# EAGLE board X15_PowerPlate (EAGLE 9.7.0)
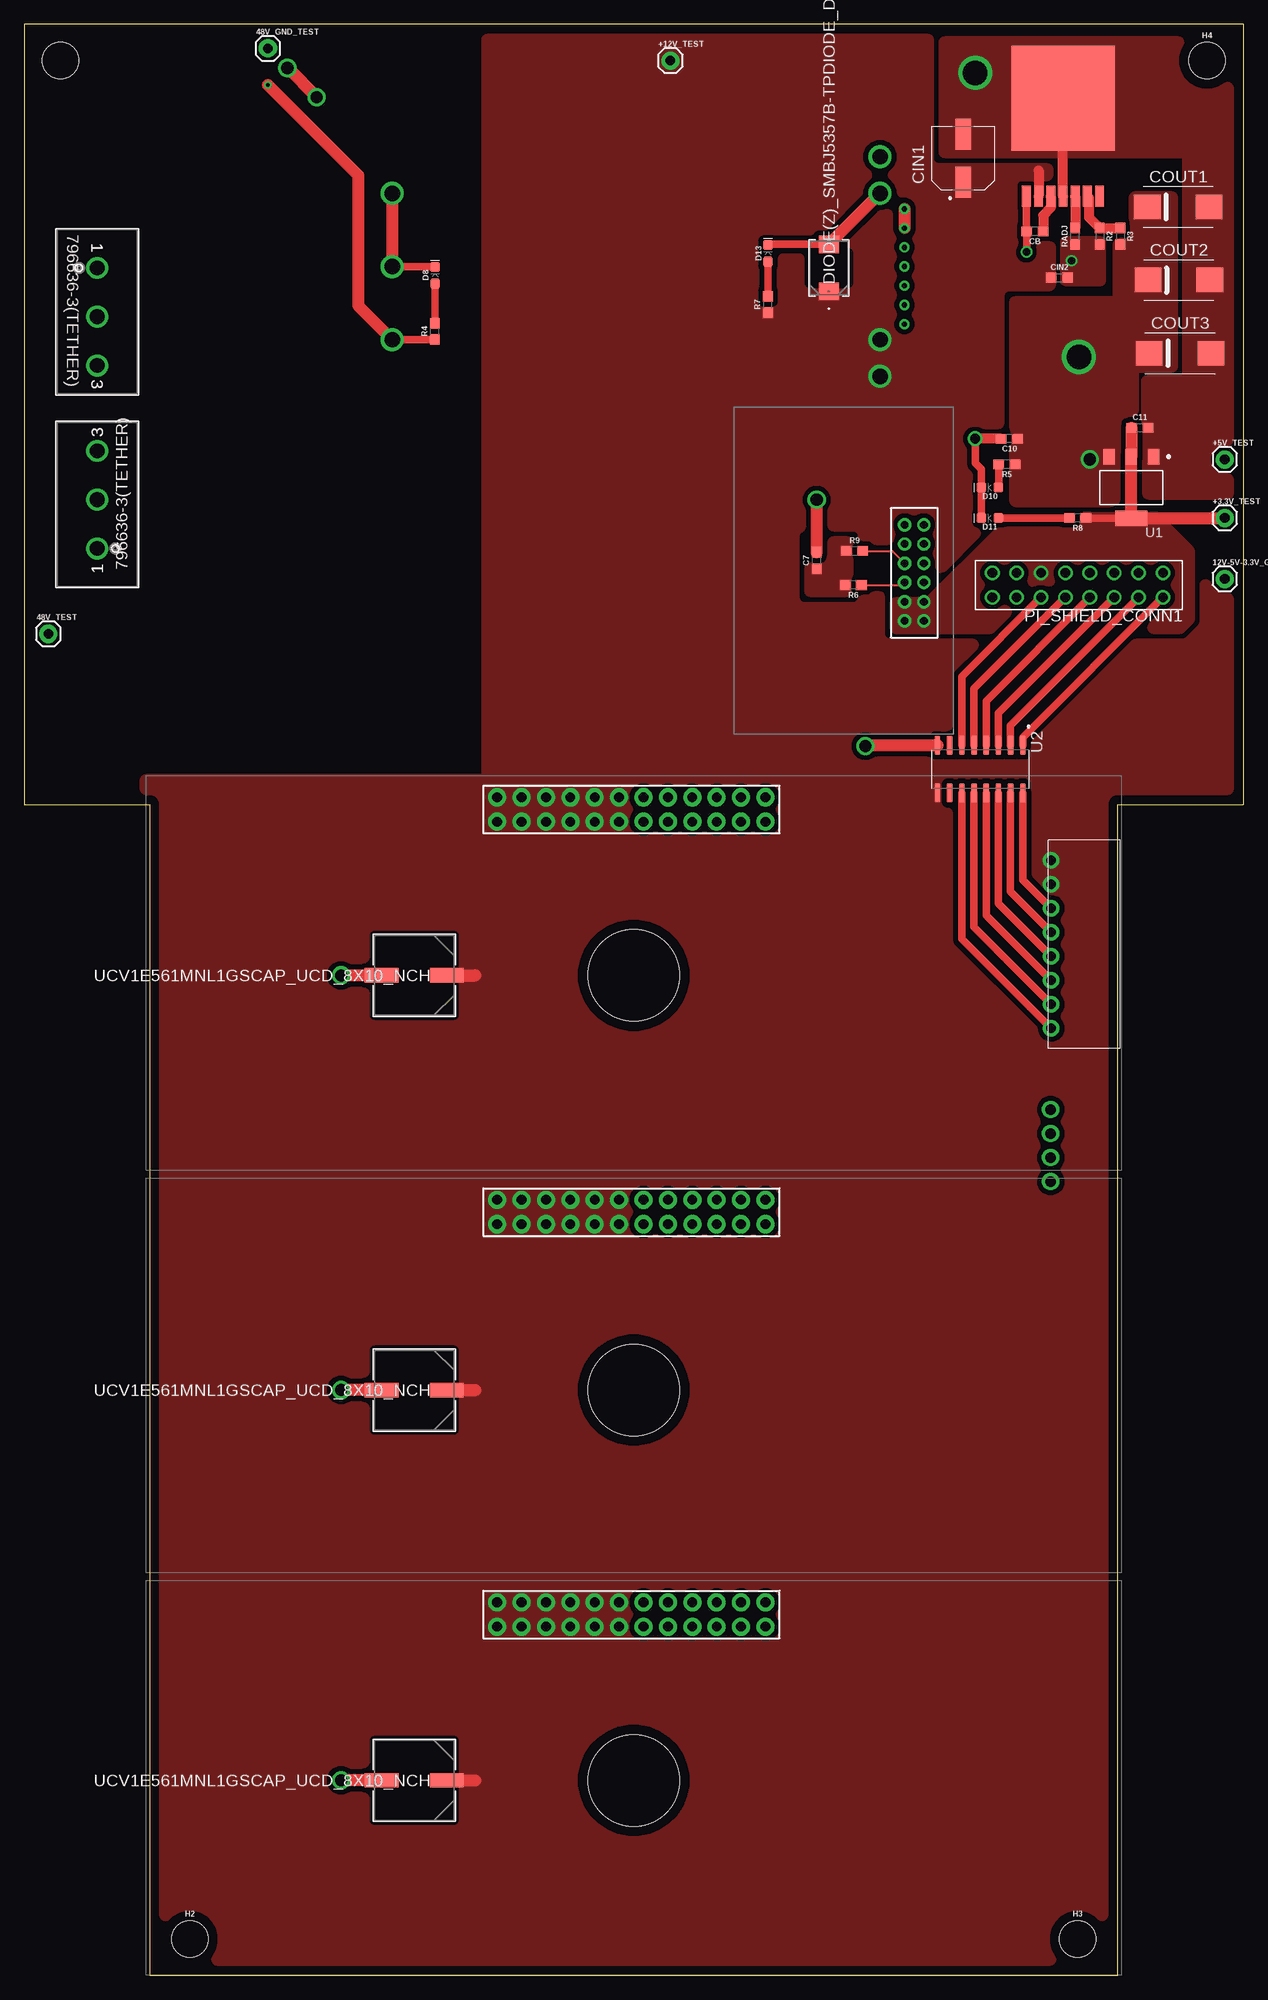
[diagram p0: board, top side]
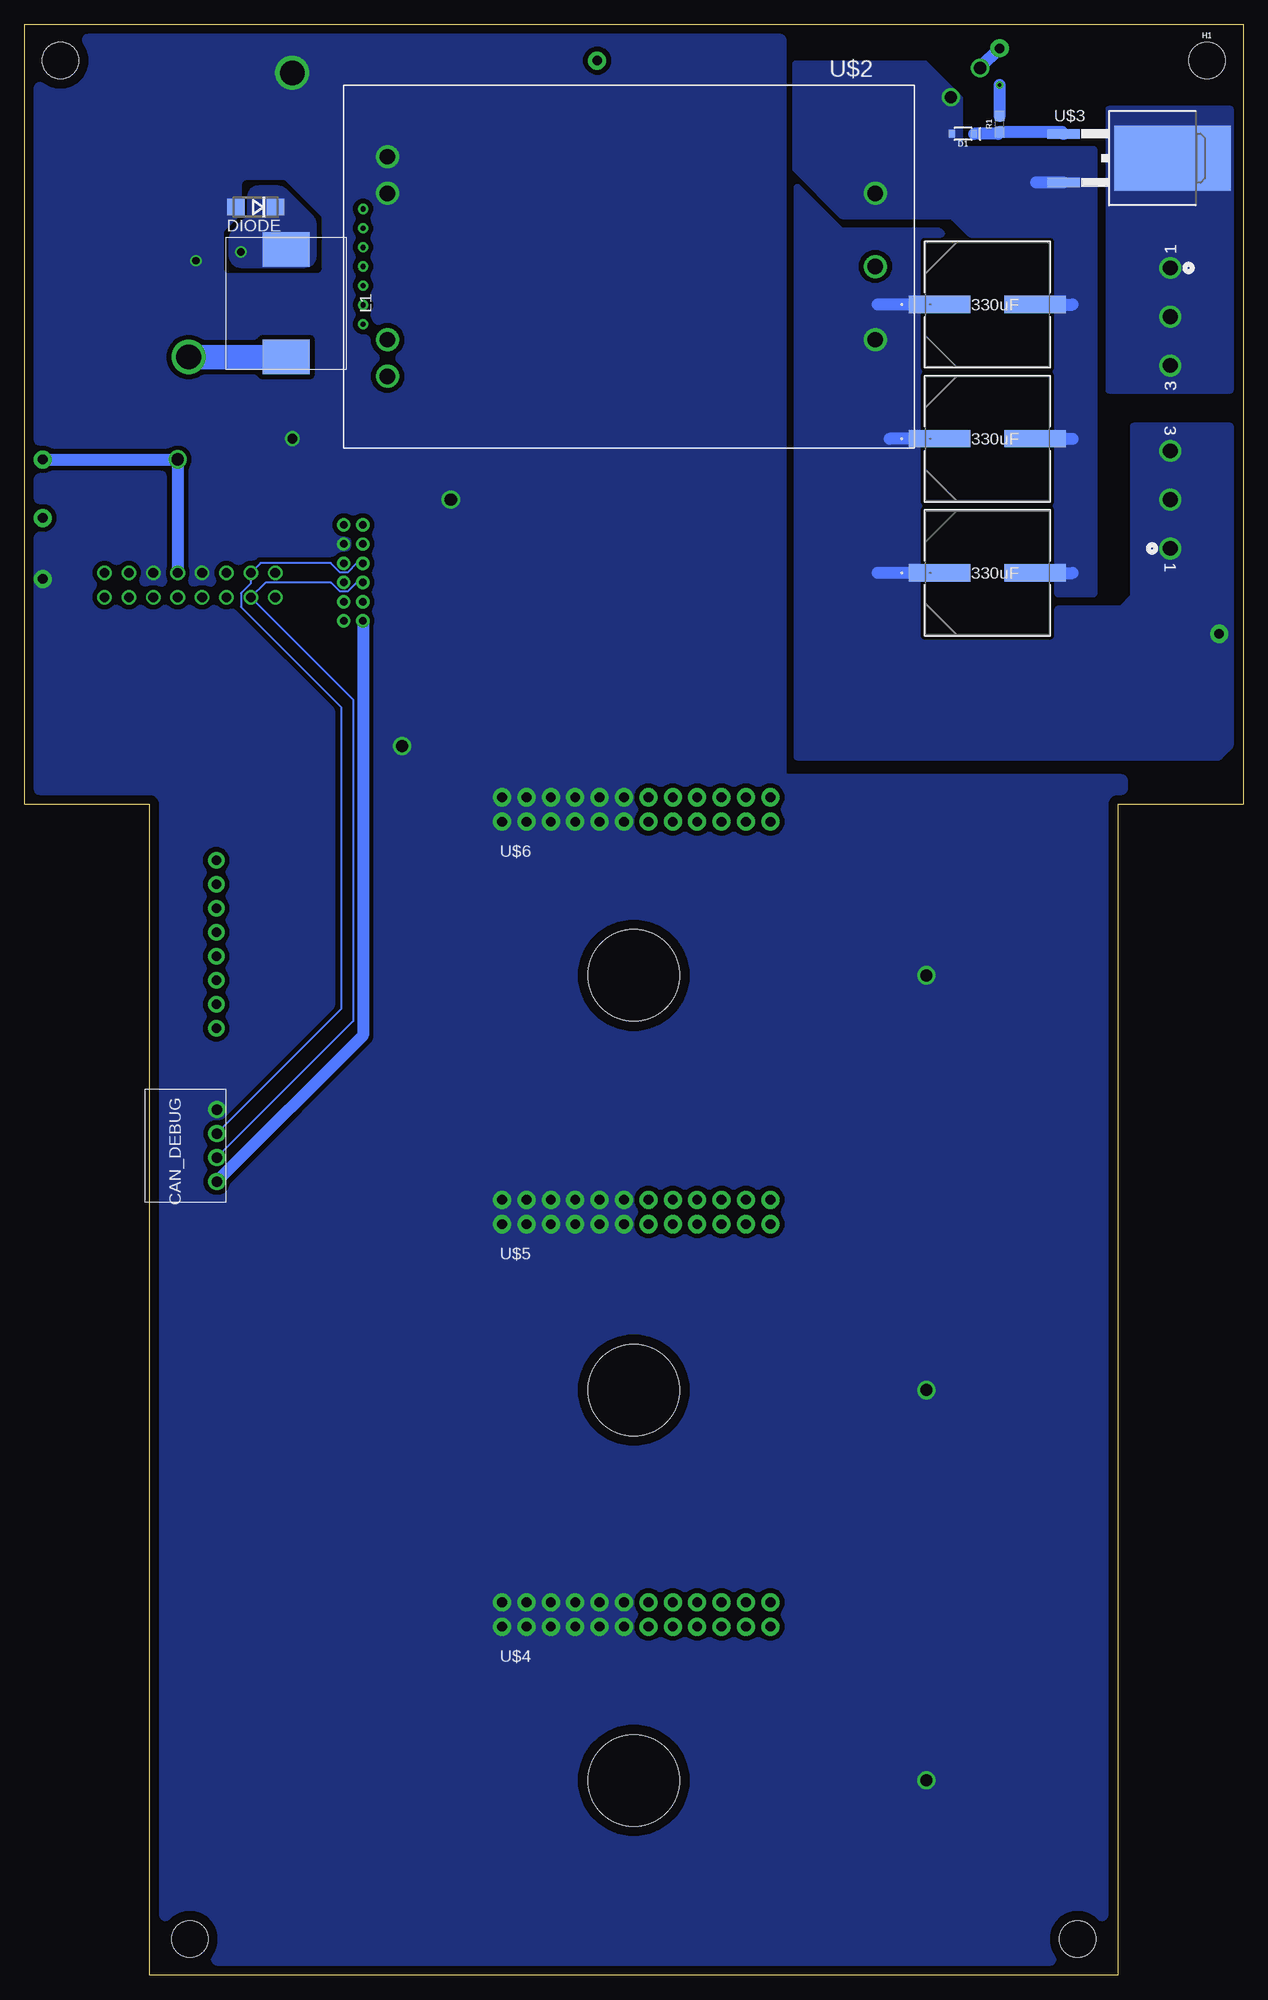
[diagram p1: board, bottom side, seen from below]

Size 127 x 203.2 mm. Coordinates in mm from the lower left corner, seen from the top.
Outline: 13.08,0 113.92,0 113.92,121.92 127,121.92 127,203.2 0,203.2 0,121.92 13.08,121.92 13.08,0
Copper layers (1*16): Top / Bottom
Stack-up Default Layer Stack: Top User Defined 0.035mm / Dielectric-1 User Defined 1.5mm / Bottom User Defined 0.035mm
Design rules "477": minimum track width 6mil, minimum drill 0.35mm, track to track 6mil, track to pad 6mil, pad to pad 6mil, via to via 6mil, smd to smd 6mil, copper to edge 40mil, drill to drill 6mil, minimum pad ring 10mil, minimum via ring 8mil, stop-mask expansion 4mil, vias tented up to drill 0mil, thermal gap 10mil
Holes 9.53 mm at 63.5,60.96 63.5,104.14 63.5,20.32

## Footprints (pad centres in the part's own frame; a part is rotated, then mirrored left to right if it is on the bottom)
1X01 = drill 1.016 pad 1.88: 1 0,0
CAP_099112E3_VIS-M = smd 6.401 x 1.803: 1 -4.966,0; 2 4.966,0
CAP_UCD_8X10_NCH = smd 3.505 x 1.499: 1 -3.404,0; 2 3.404,0
0603 = smd 1.1 x 1: 1 -0.85,0; 2 0.85,0
PXC-PTSM-04-RA-1778641 = drill 1.1 pad 1.8: 1 0,0; 2 2.5,0; 3 5,0; 4 7.5,0
CAP_EEEFKE181XSP = smd 3.2 x 1.6: 1 -2.5,0; 2 2.5,0
2917(7343-31-METRIC) = smd 2.77 x 2.55: + -3.22,0; - 3.22,0
DIODE_DO-214AA_4P38X3P62_MCC-M = smd 1.803 x 2.108: 1 -2.451,0; 2 2.451,0
SOD-323 = smd 0.63 x 0.83: A 1.15,0; C -1.15,0
LED-0603 = smd 1 x 1: A -0.877,0; C 0.877,0
DO214AC = smd 1.8 x 1.7: A 2.05,0; C -2.05,0
BACKPLANE_CONNECTORS_BKP = drill 0.79 pad 1.39: 1 -1,-5; 2 1,-5; 3 -1,-3; 4 1,-3; 5 -1,-1; 6 1,-1; 7 -1,1; 8 1,1; 9 -1,3; 10 1,3; 11 -1,5; 12 1,5
6-32-HOLE = hole 3.81: 0,0
HCMA1305 = smd 3.6 x 4.9: 1 -5.6,0; 2 5.6,0
IPL7X2 = drill 1.016 pad 1.524: 1 2.032,3.81; 2 2.032,1.27; 3 4.572,3.81; 4 4.572,1.27; 5 7.112,3.81; 6 7.112,1.27; 7 9.652,3.81; 8 9.652,1.27; 9 12.192,3.81; 10 12.192,1.27; 11 14.732,3.81; 12 14.732,1.27; 13 17.272,3.81; 14 17.272,1.27; 15 19.812,3.81; 16 19.812,1.27
PXC-8-RA-1778683 = drill 1 pad 1.7: 1 2.1,7.2; 2 4.6,7.2; 3 7.1,7.2; 4 9.6,7.2; 5 12.1,7.2; 6 14.6,7.2; 7 17.1,7.2; 8 19.6,7.2
CON3_P5MM_VER_TERM-BLK_TYC = drill 1.524 pad 2.032: 1 0,0; 2 5.08,0; 3 10.16,0
LINEAR,AZ1117CR-3.3TRG1 = smd 1.2 x 1.6: 1 -2.3,-3.2; 2 0,-3.2; 3 2.3,-3.2 | smd 3.3 x 1.6: 4 0,3.2
16-SOIC = smd 1.97 x 0.6: 1 -2.475,4.445; 2 -2.475,3.175; 3 -2.475,1.905; 4 -2.475,0.635; 5 -2.475,-0.635; 6 -2.475,-1.905; 7 -2.475,-3.175; 8 -2.475,-4.445; 9 2.475,-4.445; 10 2.475,-3.175; 11 2.475,-1.905; 12 2.475,-0.635; 13 2.475,0.635; 14 2.475,1.905; 15 2.475,3.175; 16 2.475,4.445
BMR480_CONNECTOR = drill 1.6 pad 2: PIN1 4.06,26.52; PIN2 4.06,18.9; PIN3 4.06,11.28; PIN4 54.86,7.47; PIN5 54.86,11.28; PIN7 54.86,26.52; PIN8 54.86,30.33 | drill 0.55: PIN9 57.4,12.9; PIN10 57.4,14.9; PIN11 57.4,16.9; PIN12 57.4,18.9; PIN13 57.4,20.9; PIN14 57.4,22.9; PIN15 57.4,24.9
D2PAK = smd 3.4 x 1: 1 -6.552,2.54; 2 -6.552,-2.54 | smd 12.14 x 6.8: 3 4.818,0
BACKPLANE_ESC_ADAPTER_BKP_PWR = drill 1.016 pad 1.88: 12V@1 65.024,36.322; 12V@2 65.024,38.862; 12V@3 62.484,36.322; 12V@4 62.484,38.862; 12V@5 59.944,36.322; 12V@6 59.944,38.862; 12V@7 57.404,36.322; 12V@8 57.404,38.862; 12V@9 54.864,36.322; 12V@10 54.864,38.862; 12V@11 52.324,36.322; 12V@12 52.324,38.862; GND@1 49.784,38.862; GND@2 49.784,36.322; GND@3 47.244,38.862; GND@4 47.244,36.322; GND@5 44.704,38.862; GND@6 44.704,36.322; GND@7 42.164,38.862; GND@8 42.164,36.322; GND@9 39.624,38.862; GND@10 39.624,36.322; GND@11 37.084,38.862; GND@12 37.084,36.322
BUCK,LM2679SX-ADJ = smd 2.16 x 0.91: PIN1 0,-7.62; PIN2 0,-6.35; PIN3 0,-5.08; PIN4 0,-3.81; PIN5 0,-2.54; PIN6 0,-1.27; PIN7 0,0 | smd 10.918 x 10.8: PIN8 -10.195,-3.81

## Placement (x,y rotation side)
12V-5V-3.3V_GND  [1X01]  125.04,145.41 0 top
48V_GND_TEST  [1X01]  25.4,200.66 0 top
48V_TEST  [1X01]  2.54,139.7 0 top
+3.3V_TEST  [1X01]  125.04,151.76 0 top
+5V_TEST  [1X01]  125.04,157.86 0 top
+12V_TEST  [1X01]  67.31,199.39 0 top
C1  330uF  [CAP_099112E3_VIS-M]  26.67,146.05 0 bottom
C2  330uF  [CAP_099112E3_VIS-M]  26.67,173.99 0 bottom
C3  330uF  [CAP_099112E3_VIS-M]  26.67,160.02 0 bottom
C4  UCV1E561MNL1GSCAP_UCD_8X10_NCH  [CAP_UCD_8X10_NCH]  40.64,104.14 180 top
C5  UCV1E561MNL1GSCAP_UCD_8X10_NCH  [CAP_UCD_8X10_NCH]  40.64,60.96 180 top
C6  UCV1E561MNL1GSCAP_UCD_8X10_NCH  [CAP_UCD_8X10_NCH]  40.64,20.32 180 top
C7  0.1uF  [0603]  82.55,147.32 90 top
C10  10uF  [0603]  102.62,160.02 180 top
C11  22uF  [0603]  116.2,161.16 0 top
CAN_DEBUG  PXC-PTSM-04-RA-1778641  [PXC-PTSM-04-RA-1778641]  106.92,90.17 270 bottom
CB  .01uF  [0603]  105.28,181.61 180 top
CIN1  180uF  [CAP_EEEFKE181XSP]  97.79,189.23 90 top
CIN2  .47uF  [0603]  107.82,176.78 0 top
COUT1  150uF  [2917(7343-31-METRIC)]  120.2,184.15 0 top
COUT2  150uF  [2917(7343-31-METRIC)]  120.27,176.53 0 top
COUT3  150uF  [2917(7343-31-METRIC)]  120.4,168.91 0 top
CR1  DIODE(Z)_SMBJ5357B-TPDIODE_DO-214AA_4P38X3P62_MCC-M  [DIODE_DO-214AA_4P38X3P62_MCC-M]  83.82,177.8 90 top
D1  DIODE-ZENERPZU15B3A,115  [SOD-323]  29.21,191.77 180 bottom
D8  RED  [LED-0603]  42.8,177.04 90 top
D10  BLUE  [LED-0603]  100.58,154.94 180 top
D11  WHITE  [LED-0603]  100.58,151.76 180 top
D13  GREEN  [LED-0603]  77.47,179.32 90 top
DIODE  40V  [DO214AC]  102.87,184.15 180 bottom
ESC_CONTROLLER  BACKPLANE_CONNECTORSBKP  [BACKPLANE_CONNECTORS_BKP]  92.71,146.05 0 top
H1  6-32-HOLE  [6-32-HOLE]  3.81,199.39 0 bottom
H2  6-32-HOLE  [6-32-HOLE]  17.27,3.81 0 top
H3  6-32-HOLE  [6-32-HOLE]  109.73,3.81 0 top
H4  6-32-HOLE  [6-32-HOLE]  123.19,199.39 0 top
L1  15uH  [HCMA1305]  99.69,174.12 270 bottom
PI_SHIELD_CONN1  8X_CONN  [IPL7X2]  120.65,147.32 180 top
R1  1M  [0603]  25.4,192.79 90 bottom
R2  1k  [0603]  112.01,181.1 270 top
R3  3.32k  [0603]  114.17,181.1 270 top
R4  1.5k  [0603]  42.8,171.2 90 top
R5  100  [0603]  102.36,157.35 180 top
R6  60  [0603]  86.36,144.78 180 top
R7  470  [0603]  77.47,173.99 90 top
R8  20  [0603]  109.73,151.76 180 top
R9  60  [0603]  86.49,148.34 0 top
RADJ  12.4k  [0603]  109.47,181.1 90 top
SOLENOID  PXC-8-RA-1778683  [PXC-8-RA-1778683]  114.17,96.52 90 top
TETHER_48V  796636-3(TETHER)  [CON3_P5MM_VER_TERM-BLK_TYC]  7.62,148.59 90 top
TETHER_GND  796636-3(TETHER)  [CON3_P5MM_VER_TERM-BLK_TYC]  7.62,177.8 270 top
U1  LINEAR,AZ1117CR-3.3TRG1DIODES_AZ1117CH-3.3TRG1_0_0  [LINEAR,AZ1117CR-3.3TRG1]  115.31,154.94 180 top
U2  ULN2003AD  [16-SOIC]  99.57,125.6 270 top
U$2  CONN_BMR480_CONNECTOR(BRICK)  [BMR480_CONNECTOR]  34.29,196.85 180 bottom
U$3  TRANS_IRF1018ESTRLPBF  [D2PAK]  12.19,189.23 0 bottom
U$4  BACKPLANE_ESC_ADAPTER_PWRBKP  [BACKPLANE_ESC_ADAPTER_BKP_PWR]  114.3,0 0 bottom
U$5  BACKPLANE_ESC_ADAPTER_PWRBKP  [BACKPLANE_ESC_ADAPTER_BKP_PWR]  114.3,41.91 0 bottom
U$6  BACKPLANE_ESC_ADAPTER_PWRBKP  [BACKPLANE_ESC_ADAPTER_BKP_PWR]  114.3,83.82 0 bottom
U$7  BUCK,LM2679SX-ADJ  [BUCK,LM2679SX-ADJ]  112.01,185.26 270 top

## Library data of the parts
12V-5V-3.3V_GND 48V_GND_TEST 48V_TEST +3.3V_TEST +5V_TEST +12V_TEST = SparkFun-Connectors
C1-C3 = X15_Brickstribution; COPYRIGHT: Copyright (C) 2022 Ultra Librarian. All rights reserved.; MANUFACTURER_PART_NUMBER: MAL215099112E3; MFR_NAME: Vishay
C4-C6 = 2023-01-03_19-29-37_Library; COPYRIGHT: Copyright (C) 2023 Ultra Librarian. All rights reserved.; DIGI-KEY_PART_NUMBER_1: 493-14353-1-ND; DIGI-KEY_PART_NUMBER_2: 493-14353-2-ND; DIGI-KEY_PART_NUMBER_3: 493-14353-6-ND; MANUFACTURER_PART_NUMBER: UCV1E561MNL1GS; MFR_NAME: Nichicon
C7 = SparkFun-Capacitors; PROD_ID: CAP-08390
C10 C11 CB CIN2 = SparkFun-Capacitors; PROD_ID: CAP-07880
CAN_DEBUG ESC_CONTROLLER PI_SHIELD_CONN1 U$4-U$6 = X15-Backplane Parts
CIN1 = X15-Conversion-Parts-Library; DESCRIPTION: 180µF 25V Aluminum Electrolytic Capacitors Radial, Can - SMD 340mOhm @ 100kHz 2000 Hrs @ 105°C; DIGI-KEY_PART_NUMBER: P18956TR-ND; MF: Panasonic; MP: EEEFKE181XSP; PACKAGE: RADIAL-2 Panasonic
COUT1-COUT3 DIODE L1 U$7 = X15-Conversion-Parts-Library
CR1 = X15_Brickstribution; COPYRIGHT: Copyright (C) 2022 Ultra Librarian. All rights reserved.; MANUFACTURER_PART_NUMBER: SMBJ5357B-TP; MFR_NAME: MCC
D1 = SparkFun-DiscreteSemi; ZENER_VOLTAGE: 15V
D8 = SparkFun-LED; PROD_ID: DIO-00819
D10 = SparkFun-LED; PROD_ID: DIO-08575
D11 = SparkFun-LED; PROD_ID: DIO-09004
D13 = SparkFun-LED; PROD_ID: DIO-00821
H1-H4 U$3 = X15_Brickstribution
R1 = SparkFun-Resistors; PROD_ID: RES-07868
R2 R3 RADJ = SparkFun-Resistors; PROD_ID: RES-08296
R4 = SparkFun-Resistors; PROD_ID: RES-08306
R5 = SparkFun-Resistors; PROD_ID: RES-12438
R6 R9 = SparkFun-Resistors
R7 = SparkFun-Resistors; PROD_ID: RES-07869
R8 = SparkFun-Resistors; PROD_ID: RES-07862
SOLENOID = X15-Backplane Parts; SPICEPREFIX: X
TETHER_48V TETHER_GND = X15_Brickstribution; COPYRIGHT: Copyright (C) 2022 Ultra Librarian. All rights reserved.; DIGI-KEY_PART_NUMBER_1: A98423-ND; MANUFACTURER_PART_NUMBER: 796636-3; MFR_NAME: TE Connectivity
U1 = X15-Conversion-Parts-Library; AVAILABILITY: In Stock; DESCRIPTION: Linear Voltage Regulator IC Positive Fixed 1 Output 1A SOT-223-3; MF: Diodes Inc.; MP: AZ1117CH-3.3TRG1; PACKAGE: SOT-223 Diodes Inc.; PRICE: None; PURCHASE-URL: https://pricing.snapeda.com/search/part/AZ1117CH-3.3TRG1/?ref=eda
U2 = X15-Pi-Shield-Parts; A1_MIN: 0.25; A_MAX: 1.75; A_MIN: 1.75; A_NOM: 1.75; B_MAX: 0.51; B_MIN: 0.33; B_NOM: 0.42; D2_MAX: 0.0; D_MAX: 10.0; D_MIN: 9.8; D_NOM: 9.9; E1_MAX: 4.0; E1_MIN: 3.8; E1_NOM: 3.9; E2_MAX: 0.0; ENOM: 1.27; E_MAX: 6.2; E_MIN: 5.8; E_NOM: 6.0; L_MAX: 1.27; L_MIN: 0.38; L_NOM: 0.825; MANUFACTURER: Diodes Inc.; PIN_COUNT: 16.0; SNAPEDA_PACKAGE_ID: 27538; STANDARD: IPC 7351B
U$2 = X15-Parts_Bricktribution

## Nets
12V_GND: 12V-5V-3.3V_GND.1 C4.2 C5.2 C6.2 C7.2 C10.2 C11.2 CAN_DEBUG.1 CIN1.2 CIN2.2 COUT1.- COUT2.- COUT3.- CR1.2 D10.C D11.C D13.C DIODE.A ESC_CONTROLLER.10 PI_SHIELD_CONN1.6 PI_SHIELD_CONN1.10 R2.2 RADJ.1 U1.1 U2.8 U$2.PIN4 U$2.PIN5 U$4.GND@1 U$4.GND@2 U$4.GND@3 U$4.GND@4 U$4.GND@5 U$4.GND@6 U$4.GND@7 U$4.GND@8 U$4.GND@9 U$4.GND@10 U$4.GND@11 U$4.GND@12 U$5.GND@1 U$5.GND@2 U$5.GND@3 U$5.GND@4 U$5.GND@5 U$5.GND@6 U$5.GND@7 U$5.GND@8 U$5.GND@9 U$5.GND@10 U$5.GND@11 U$5.GND@12 U$6.GND@1 U$6.GND@2 U$6.GND@3 U$6.GND@4 U$6.GND@5 U$6.GND@6 U$6.GND@7 U$6.GND@8 U$6.GND@9 U$6.GND@10 U$6.GND@11 U$6.GND@12 U$7.PIN4 U$7.PIN8
48V_GND: 48V_GND_TEST.1 C1.2 C2.2 C3.2 D1.A D8.C U$2.PIN2 U$2.PIN3 U$3.2
+3.3V: +3.3V_TEST.1 C11.1 CAN_DEBUG.4 ESC_CONTROLLER.1 ESC_CONTROLLER.2 ESC_CONTROLLER.3 ESC_CONTROLLER.4 PI_SHIELD_CONN1.12 R8.1 U1.2 U1.4
+5.2V: +5V_TEST.1 C10.1 COUT1.+ COUT2.+ COUT3.+ L1.2 PI_SHIELD_CONN1.8 R3.2 R5.1 U1.3
+12V: +12V_TEST.1 C4.1 C5.1 C6.1 CIN1.1 CIN2.1 CR1.1 R7.1 SOLENOID.7 SOLENOID.8 U2.9 U$2.PIN7 U$2.PIN8 U$4.12V@1 U$4.12V@2 U$4.12V@3 U$4.12V@4 U$4.12V@5 U$4.12V@6 U$4.12V@7 U$4.12V@8 U$4.12V@9 U$4.12V@10 U$4.12V@11 U$4.12V@12 U$5.12V@1 U$5.12V@2 U$5.12V@3 U$5.12V@4 U$5.12V@5 U$5.12V@6 U$5.12V@7 U$5.12V@8 U$5.12V@9 U$5.12V@10 U$5.12V@11 U$5.12V@12 U$6.12V@1 U$6.12V@2 U$6.12V@3 U$6.12V@4 U$6.12V@5 U$6.12V@6 U$6.12V@7 U$6.12V@8 U$6.12V@9 U$6.12V@10 U$6.12V@11 U$6.12V@12 U$7.PIN2
+48V: 48V_TEST.1 C1.1 C2.1 C3.1 R1.2 R4.1 TETHER_48V.1 TETHER_48V.2 TETHER_48V.3 U$2.PIN1
BOOST: CB.1 U$7.PIN3
CAN_H: CAN_DEBUG.3 ESC_CONTROLLER.5 PI_SHIELD_CONN1.13 R6.1
CAN_L: CAN_DEBUG.2 ESC_CONTROLLER.7 PI_SHIELD_CONN1.14 R9.2
CRADJ: RADJ.2 U$7.PIN5
DGND: U$2.PIN9 U$2.PIN10
ESC_ID: ESC_CONTROLLER.12
FB: R2.1 R3.1 U$7.PIN6
GND_RAW: TETHER_GND.1 TETHER_GND.2 TETHER_GND.3 U$3.3
GPIO1: PI_SHIELD_CONN1.1 U2.1
GPIO2: PI_SHIELD_CONN1.3 U2.2
GPIO3: PI_SHIELD_CONN1.5 U2.3
GPIO4: PI_SHIELD_CONN1.7 U2.4
GPIO5: PI_SHIELD_CONN1.9 U2.5
GPIO6: PI_SHIELD_CONN1.11 U2.6
N$1: C7.1 R6.2 R9.1
N$4: D8.A R4.2
N$9: D10.A R5.2
N$10: D11.A R8.2
N$13: D13.A R7.2
NRST: ESC_CONTROLLER.6
REV_GATE: D1.C R1.1 U$3.1
SA0: U$2.PIN15
SA1: U$2.PIN14
SALERT: U$2.PIN12
SCLK: U$2.PIN13
SDA: U$2.PIN11
SOL1_1: SOLENOID.6 U2.16
SOL2_1: SOLENOID.5 U2.15
SOL3_1: SOLENOID.4 U2.14
SOL4_1: SOLENOID.3 U2.13
SOL5_1: SOLENOID.2 U2.12
SOL6_1: SOLENOID.1 U2.11
SWCLK: ESC_CONTROLLER.11
SWDIO: ESC_CONTROLLER.9
SWITCH: CB.2 DIODE.C L1.1 U$7.PIN1

## Tracks (layer width: path | path; a pad name or v marks a point on that pad's centre or on a via)
12V_GND  (via drill 0.76, 1.02, 1.27, 2.54)
  Top 0.762: D13.C 77.52,180.25 CR1.2 | v99.06,160.02 99.06,157.48 99.71,156.83 D10.C D11.C
  Top 1.016: U$7.PIN4 108.2,190.25 107.95,190.5 | C10.2 v99.06,160.02
  Top 1.27: C4.2 v33.02,104.14 | C5.2 v33.02,60.96 | C6.2 v33.02,20.32 | CR1.2 89.14,185.57 U$2.PIN5 | C7.2 v82.55,153.67 | U2.8 87.69,128.08 v87.63,128.02
  other vias: 99.06,198.12 109.09,178.56
  pour Bottom (isolate 0.508, rank 2, no thermals): 128.91,203.84 48,203.84 47.62,203.46 47.62,125.09 12.06,125.09 12.06,0.64 128.91,0.64
  pour Top (isolate 0.254, no thermals): 107.95,181.1 112.65,181.1 112.65,175.9 107.95,175.9
  pour Top (isolate 0.508, no thermals): 95.25,201.93 127,201.93 127,153.67 116.33,153.67 116.33,166.62 120.65,166.62 120.65,189.23 95.25,189.23
48V_GND  (via drill 1.27)
  Top 0.762: D8.C 38.38,177.91 U$2.PIN2
  Top 1.27: v27.43,198.63 v30.48,195.58 | U$2.PIN3 U$2.PIN2
  Bottom 1.27: 48V_GND_TEST.1 v27.43,198.63 | U$3.2 21.59,186.69 | C2.2 17.78,173.99 | C3.2 17.78,160.02 | C1.2 17.78,146.05
  pour Bottom (isolate 0.508, no thermals): 15.24,190.5 15.24,143.51 24.13,143.51 25.4,144.78 25.4,177.8 30.48,182.88 41.91,182.88 46.99,187.96 46.99,199.39 33.02,199.39 29.21,195.58 29.21,190.5
+3.3V
  Top 0.762: U1.4 110.6,151.74 R8.1
  Top 1.27: C11.1 115.36,158.18 U1.2 U1.4 125.02,151.74 +3.3V_TEST.1
  Bottom 1.27: ESC_CONTROLLER.1 91.71,97.88 CAN_DEBUG.4
  pour Top (isolate 0.508, no thermals): 90.17,143.51 93.98,143.51 102.87,152.4 118.11,152.4 121.92,148.59 121.92,140.97 120.65,139.7 90.17,139.7
+5.2V  (via drill 1.27, 2.56)
  Bottom 1.27: +5V_TEST.1 v111,157.86 PI_SHIELD_CONN1.8
  Bottom 2.54: L1.2 109.84,168.52 v109.86,168.53
  pour Top (isolate 0.508, no thermals): 113.41,181.1 115.06,181.1 115.06,185.8 120.14,185.8 120.14,166.88 116.08,166.88 116.08,152.91 102.62,152.91 102.62,174.88 113.41,174.88
+12V
  Top 1.016: 105.66,187.96 U$7.PIN2
  Top 1.27: C6.1 46.99,20.32 | C5.1 46.99,60.96 | C4.1 46.99,104.14
  pour Top (isolate 0.508, rank 2, no thermals): 130.18,203.84 48,203.84 47.62,203.46 47.62,125.09 12.06,125.09 12.06,0.64 130.18,0.64
+48V  (via drill 0.35)
  Top 0.762: U$2.PIN1 42.78,170.33 R4.1
  Top 1.27: v25.4,196.85 34.8,187.45 34.8,173.88 U$2.PIN1
  Bottom 1.27: C2.1 38.1,173.99 | C3.1 36.83,160.02 | C1.1 38.1,146.05 | R1.2 v25.4,196.85
  pour Bottom (isolate 0.508, no thermals): 46.83,187.07 41.75,181.99 31.59,181.99 26.29,176.69 26.29,144.94 23.97,142.62 12.86,142.62 11.81,143.67 11.81,161.67 0.89,161.67 0.89,128.11 2.5,126.5 46.83,126.5
BOOST
  Top 1.016: U$7.PIN3 106.93,184.06 106.13,183.26 CB.1
CAN_H
  Top 0.203: R6.1 91.44,144.78 ESC_CONTROLLER.5
  Bottom 0.203: ESC_CONTROLLER.5 92.37,145.05 93.32,144.1 94.1,144.1 95.04,145.03 101.85,145.03 PI_SHIELD_CONN1.13 92.71,132.84 92.71,99.38 CAN_DEBUG.3
CAN_L
  Top 0.203: R9.2 90.42,148.34 ESC_CONTROLLER.7
  Bottom 0.203: ESC_CONTROLLER.7 92.37,147.05 93.32,146.1 94.1,146.1 95.07,147.07 102.36,147.07 PI_SHIELD_CONN1.14 103.38,144.95 104.39,143.93 104.39,142.49 93.98,132.08 93.98,100.61 CAN_DEBUG.2
CRADJ
  Top 1.016: U$7.PIN5 RADJ.2
DGND
  Top 1.27: U$2.PIN9 U$2.PIN10
FB
  Top 1.016: R3.1 R2.1 110.9,183.07 110.9,185.1 U$7.PIN6
GND_RAW
  pour Bottom (isolate 0.508, no thermals): 14.35,194.69 -0.38,194.69 -0.38,164.72 14.35,164.72
GPIO1
  Top 0.762: PI_SHIELD_CONN1.1 104.01,128.91 U2.1
GPIO2
  Top 0.762: PI_SHIELD_CONN1.3 102.74,130.18 U2.2
GPIO3
  Top 0.762: PI_SHIELD_CONN1.5 101.47,131.44 U2.3
GPIO4
  Top 0.762: PI_SHIELD_CONN1.7 100.2,132.72 U2.4
GPIO5
  Top 0.762: PI_SHIELD_CONN1.9 98.93,133.99 U2.5
GPIO6
  Top 0.762: PI_SHIELD_CONN1.11 97.66,135.25 U2.6
N$1
  pour Top (isolate 0.508, no thermals): 81.28,149.86 81.28,143.51 86.36,143.51 86.36,149.86
N$4
  Top 0.762: R4.2 D8.A
N$9
  Top 0.762: R5.2 101.51,154.99 D10.A
N$10
  Top 0.762: D11.A R8.2
N$13
  Top 0.762: R7.2 D13.A
REV_GATE
  Bottom 1.27: U$3.1 18.91,191.94 R1.1 25.57,191.77 D1.C
SOL1_1
  Top 0.762: U2.16 104.01,114.08 SOLENOID.6
SOL2_1
  Top 0.762: U2.15 102.74,112.85 SOLENOID.5
SOL3_1
  Top 0.762: U2.14 101.47,111.62 SOLENOID.4
SOL4_1
  Top 0.762: U2.13 100.2,110.39 SOLENOID.3
SOL5_1
  Top 0.762: U2.12 98.93,109.16 SOLENOID.2
SOL6_1
  Top 0.762: U2.11 97.66,107.93 SOLENOID.1
SWITCH  (via drill 0.78)
  Top 0.762: U$7.PIN1 104.39,181.65 CB.2 104.43,179.49 v104.39,179.45
  pour Bottom (isolate 0.254, no thermals): 96.52,177.8 105.66,177.8 105.66,181.36 103.76,183.26 103.76,186.44 100.08,186.44 96.52,182.88